# EAGLE board codelock (EAGLE 6.5.0)
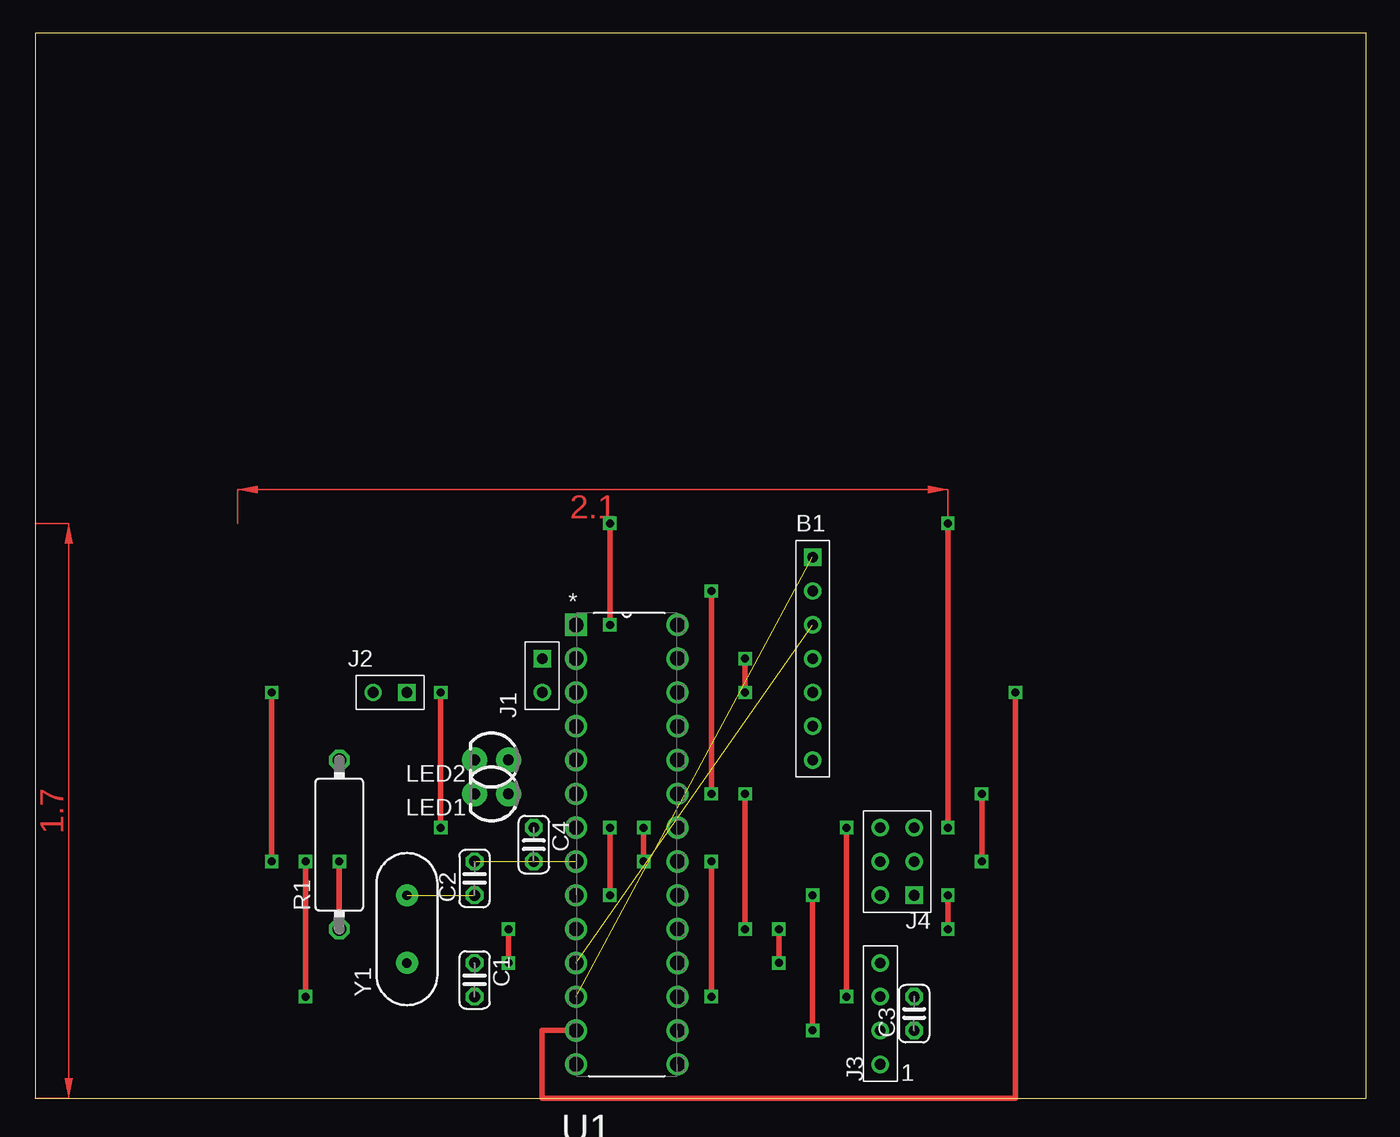
[diagram p0: board, top side]
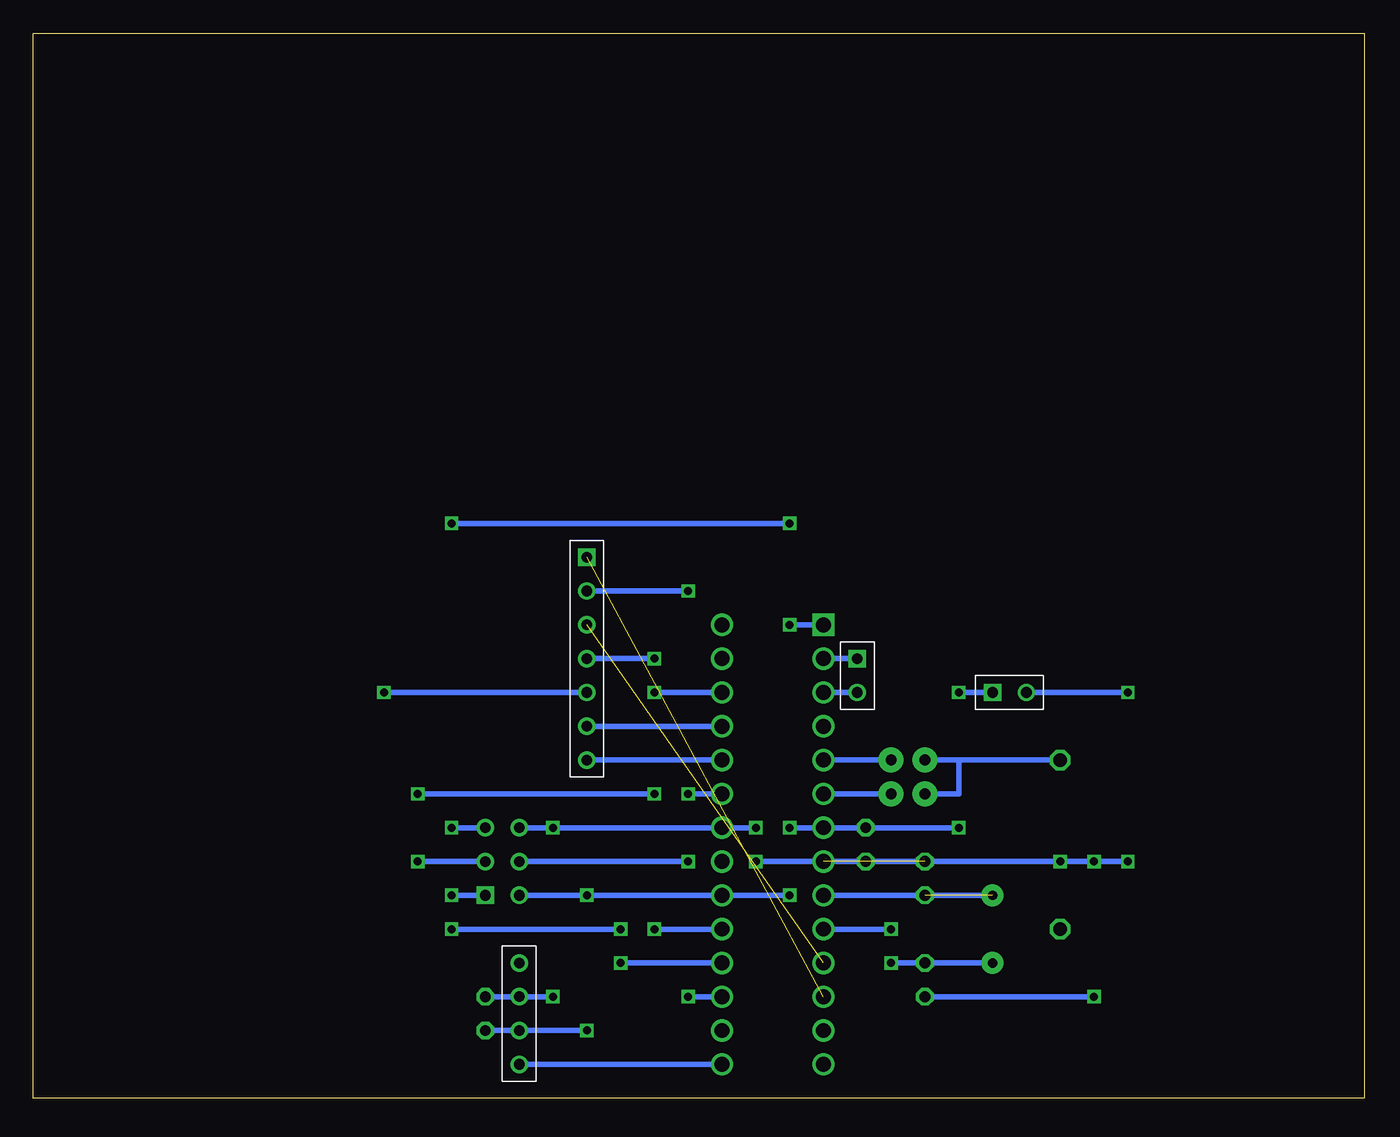
[diagram p1: board, bottom side, seen from below]

Size 100 x 80 mm. Coordinates in mm from the lower left corner, seen from the top.
Outline: 0,0 100,0 100,80 0,80 0,0
Copper layers (1*16): Top 0.035mm / dielectric 1.5mm / Bottom 0.035mm
Design rules "default": minimum track width 10mil, minimum drill 24mil, track to track 8mil, track to pad 8mil, pad to pad 8mil, via to via 8mil, smd to smd 8mil, copper to edge 40mil, drill to drill 8mil, minimum pad ring 10mil, minimum via ring 8mil, stop-mask expansion 4mil, vias tented up to drill 0mil, thermal gap 10mil

## Footprints (pad centres in the part's own frame; a part is rotated, then mirrored left to right if it is on the bottom)
KEYPAD12 = drill 0.8: C0 0,-5.08; C2 0,-10.16; R0 0,-2.54; R1 0,-15.24; R2 0,-12.7; R3 0,-7.62 | drill 0.8 square: C1 0,0
C025-024X044 = drill 0.813 octagon: 1 -1.27,0; 2 1.27,0
1BY2 = drill 0.8 square: 1 0,1.27 | drill 0.8: 2 0,-1.27
2.54MM1X4TH = drill 0.8: 1 0,0; 2 2.54,0; 3 5.08,0; 4 7.62,0
DUALHEAD_TH_6 = drill 0.8 square: 1 -1.27,2.54 | drill 0.8: 2 1.27,2.54; 3 -1.27,0; 4 1.27,0; 5 -1.27,-2.54; 6 1.27,-2.54
LED3MM = drill 0.813 pad 1.88: A -1.27,0; K 1.27,0
V234/12 = drill 1.016 octagon: 1 -6.35,0; 2 6.35,0
DIP254P762X457-28 = drill 1.118 square: 1 -7.62,33.02 | drill 1.118: 2 -7.62,30.48; 3 -7.62,27.94; 4 -7.62,25.4; 5 -7.62,22.86; 6 -7.62,20.32; 7 -7.62,17.78; 8 -7.62,15.24; 9 -7.62,12.7; 10 -7.62,10.16; 11 -7.62,7.62; 12 -7.62,5.08; 13 -7.62,2.54; 14 -7.62,0; 15 0,0; 16 0,2.54; 17 0,5.08; 18 0,7.62; 19 0,10.16; 20 0,12.7; 21 0,15.24; 22 0,17.78; 23 0,20.32; 24 0,22.86; 25 0,25.4; 26 0,27.94; 27 0,30.48; 28 0,33.02
HC49US = drill 0.7 pad 1.651: 1 -2.54,0; 2 2.54,0

## Placement (x,y rotation side)
B1  KEYPAD12  [KEYPAD12]  58.42,40.64 0 top
C1  22pF  [C025-024X044]  33.02,8.89 270 top
C2  22pF  [C025-024X044]  33.02,16.51 90 top
C3  [C025-024X044]  66.04,6.35 90 top
C4  [C025-024X044]  37.47,19.05 270 top
J1  1BY2THROUGHHOLE  [1BY2]  38.1,31.75 0 top
J2  1BY2THROUGHHOLE  [1BY2]  26.67,30.48 270 top
J3  4PIN2.54MM1X4TH  [2.54MM1X4TH]  63.5,2.54 90 top
J4  ISP  [DUALHEAD_TH_6]  64.77,17.78 180 top
LED1  [LED3MM]  34.29,22.86 180 top
LED2  [LED3MM]  34.29,25.4 180 top
R1  330R  [V234/12]  22.86,19.05 90 top
U1  ATMEGA168-20PU  [DIP254P762X457-28]  48.26,2.54 0 top
Y1  [HC49US]  27.94,12.7 90 top

## Library data of the parts
B1 = Misc
C1-C4 R1 = passives
J1-J4 = Headers
LED1 LED2 = Semiconductors
U1 = Atmel_By_element14_Batch_1; DESCRIPTION: Microcontroller; MPN: ATMEGA168-20PU; OC_FARNELL: 9171207; OC_NEWARK: 01M6892; PACKAGE: PCDIP-28; SUPPLIER: ATMEL
Y1 = SparkFun

## Nets
+3V3: C3.1 C4.1 J2.1 J3.2 J4.2 U1.7 U1.20
C0: B1.C0 U1.11
C1: B1.C1 U1.12
C2: B1.C2 U1.13
GND: C1.2 C2.2 C3.2 C4.2 J2.2 J3.3 J4.6 R1.1 U1.8 U1.22
LED_GREEN: LED2.A U1.5
LED_RED: LED1.A U1.6
N$1: LED1.K LED2.K R1.2
N$2: J4.4 U1.17
N$3: J4.1 U1.18
N$4: J4.3 U1.19
NRESET: J4.5 U1.1
R0: B1.R0 U1.23
R1: B1.R1 U1.24
R2: B1.R2 U1.25
R3: B1.R3 U1.26
RX: J1.1 U1.2
SERVO: J3.1 U1.15
TOSC1: C2.1 U1.9 Y1.2
TOSC2: C1.1 U1.10 Y1.1
TX: J1.2 U1.3

## Tracks (layer width: path | path; a pad name or v marks a point on that pad's centre or on a via)
+3V3  (via drill 0.6)
  Top 0.406: v58.42,15.24 v58.42,5.08 | v30.48,30.48 v30.48,20.32 | v43.18,20.32 v43.18,15.24
  Bottom 0.406: v58.42,5.08 J3.2 C3.1 | J2.1 v30.48,30.48 | v30.48,20.32 C4.1 U1.7 v43.18,20.32 | v43.18,15.24 U1.20 v58.42,15.24 J4.2
C0  (1 unrouted)
C1  (1 unrouted)
C2  (via drill 0.6)
  Top 0.406: U1.13 38.1,5.08 38.1,0 73.66,0 v73.66,30.48
  Bottom 0.406: v73.66,30.48 B1.C2
GND  (via drill 0.6)  (2 unrouted)
  Top 0.406: R1.1 v22.86,17.78 | v60.96,7.62 v60.96,20.32 | v20.32,7.62 v20.32,17.78 | v17.78,30.48 v17.78,17.78 | v45.72,20.32 v45.72,17.78
  Bottom 0.406: C3.2 J3.3 v60.96,7.62 | C1.2 v20.32,7.62 | J2.2 v17.78,30.48 | v17.78,17.78 v20.32,17.78 v22.86,17.78 U1.8 v45.72,17.78 | v45.72,20.32 U1.22 v60.96,20.32 J4.6
LED_GREEN
  Bottom 0.406: LED2.A U1.5
LED_RED
  Bottom 0.406: LED1.A U1.6
N$1
  Bottom 0.406: LED1.K 30.48,22.86 30.48,25.4 LED2.K R1.2
N$2  (via drill 0.6)
  Top 0.406: v50.8,7.62 v50.8,17.78
  Bottom 0.406: U1.17 v50.8,7.62 | v50.8,17.78 J4.4
N$3  (via drill 0.6)
  Top 0.406: v55.88,10.16 v55.88,12.7 | v68.58,12.7 v68.58,15.24
  Bottom 0.406: U1.18 v55.88,10.16 | v55.88,12.7 v68.58,12.7 | v68.58,15.24 J4.1
N$4  (via drill 0.6)
  Top 0.406: v53.34,12.7 v53.34,22.86 | v71.12,22.86 v71.12,17.78
  Bottom 0.406: U1.19 v53.34,12.7 | v53.34,22.86 v71.12,22.86 | v71.12,17.78 J4.3
NRESET  (via drill 0.6)
  Top 0.406: v43.18,35.56 v43.18,43.18 | v68.58,43.18 v68.58,20.32
  Bottom 0.406: U1.1 v43.18,35.56 | v43.18,43.18 v68.58,43.18 | v68.58,20.32 J4.5
R0  (via drill 0.6)
  Top 0.406: v50.8,22.86 v50.8,38.1
  Bottom 0.406: U1.23 v50.8,22.86 | v50.8,38.1 B1.R0
R1
  Bottom 0.406: U1.24 B1.R1
R2
  Bottom 0.406: B1.R2 U1.25
R3  (via drill 0.6)
  Top 0.406: v53.34,30.48 v53.34,33.02
  Bottom 0.406: U1.26 v53.34,30.48 | v53.34,33.02 B1.R3
RX
  Bottom 0.406: J1.1 U1.2
SERVO
  Bottom 0.406: U1.15 J3.1
TOSC1  (1 unrouted)
  Bottom 0.406: Y1.2 U1.9
TOSC2  (via drill 0.6)
  Top 0.406: v35.56,10.16 v35.56,12.7
  Bottom 0.406: Y1.1 C1.1 v35.56,10.16 | v35.56,12.7 U1.10
TX
  Bottom 0.406: U1.3 J1.2
(copper drawn outside any net)
  shapes: Top area x2